# Altium PCB LO2.PcbDoc
Units mil, origin at the board's own origin, x right, y up, seen from the top; angles counter-clockwise.
Board outline 1416.47 x 1876.47 mil, 4 copper layers (Top Layer, Internal Plane 1, Internal Plane 2, Bottom Layer), stack 29.834 mil thick; 133 components, 80 nets, 435 pads, 291 vias.
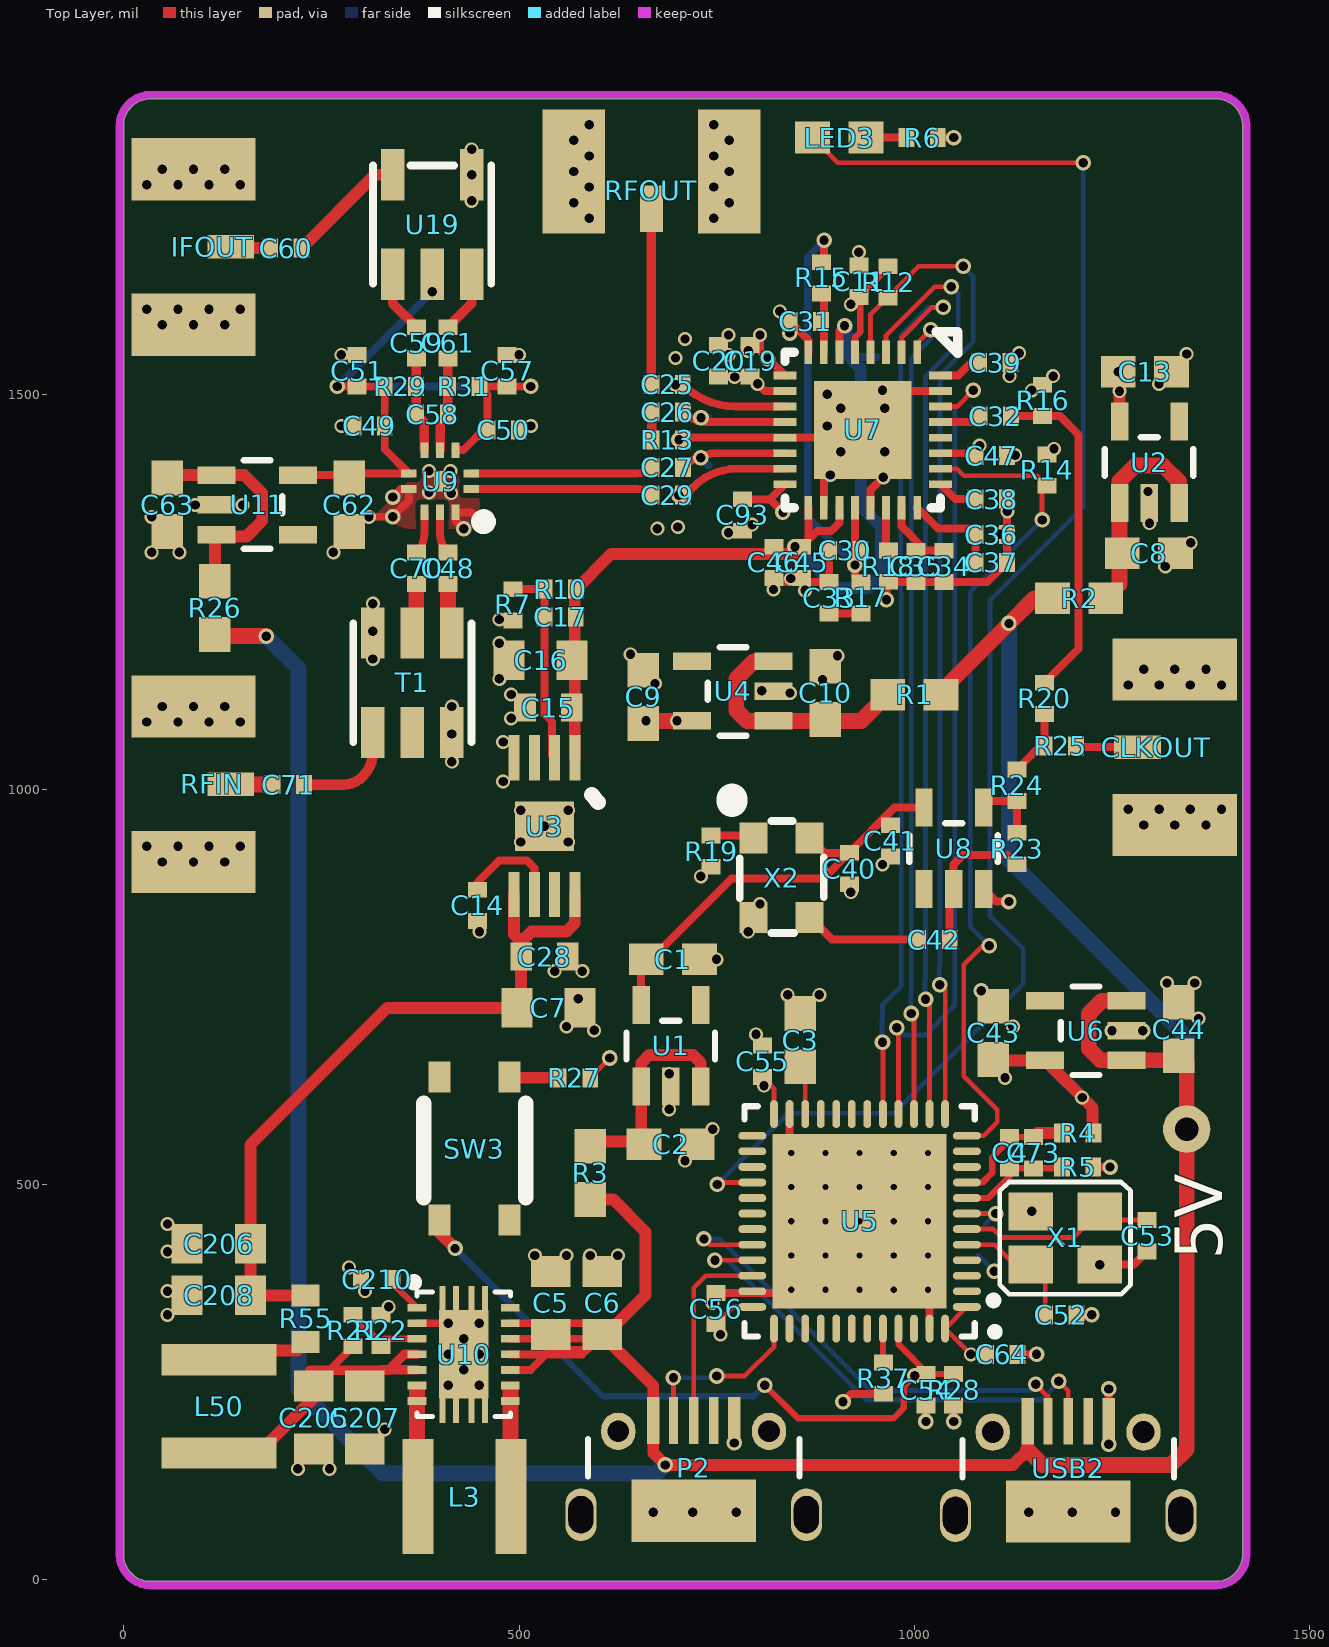
[diagram p0: Top Layer view]
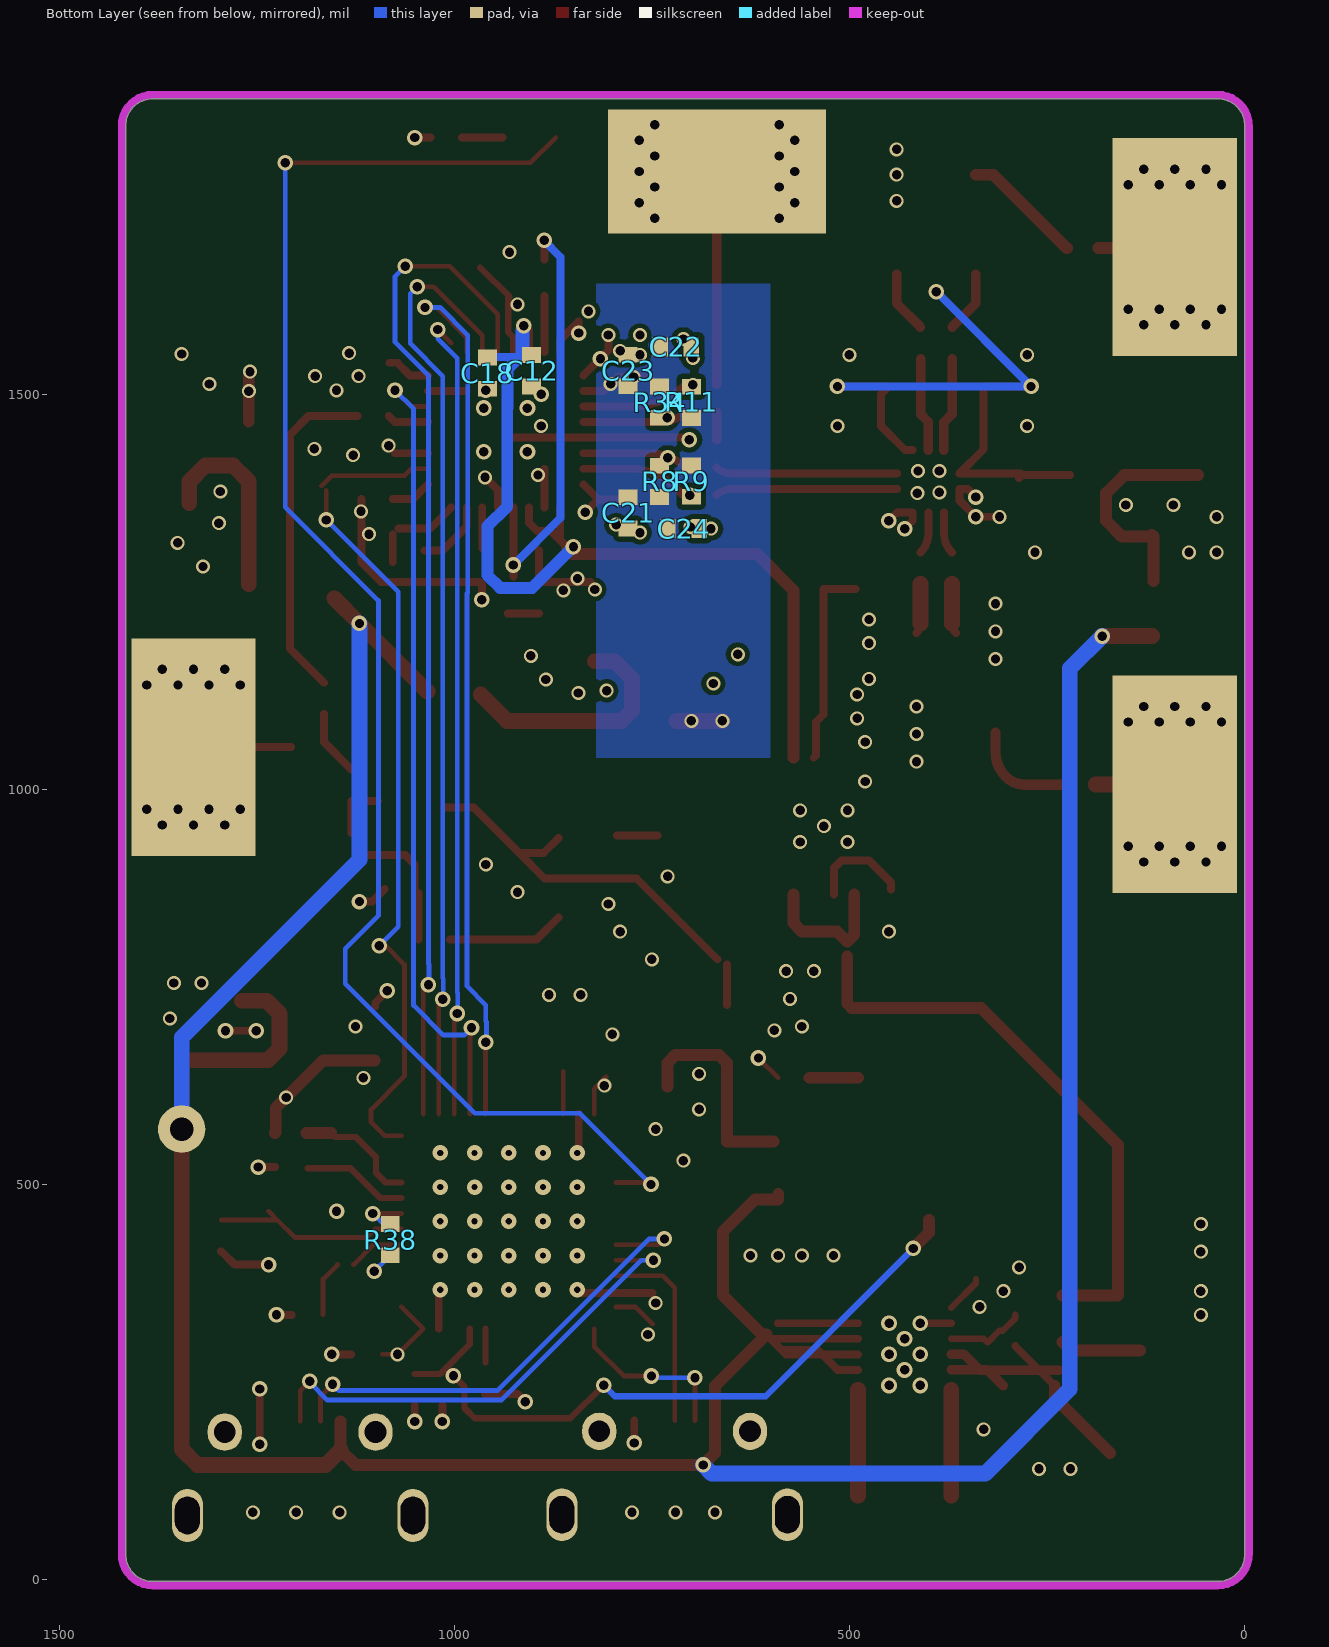
[diagram p1: Bottom Layer view, seen from below]
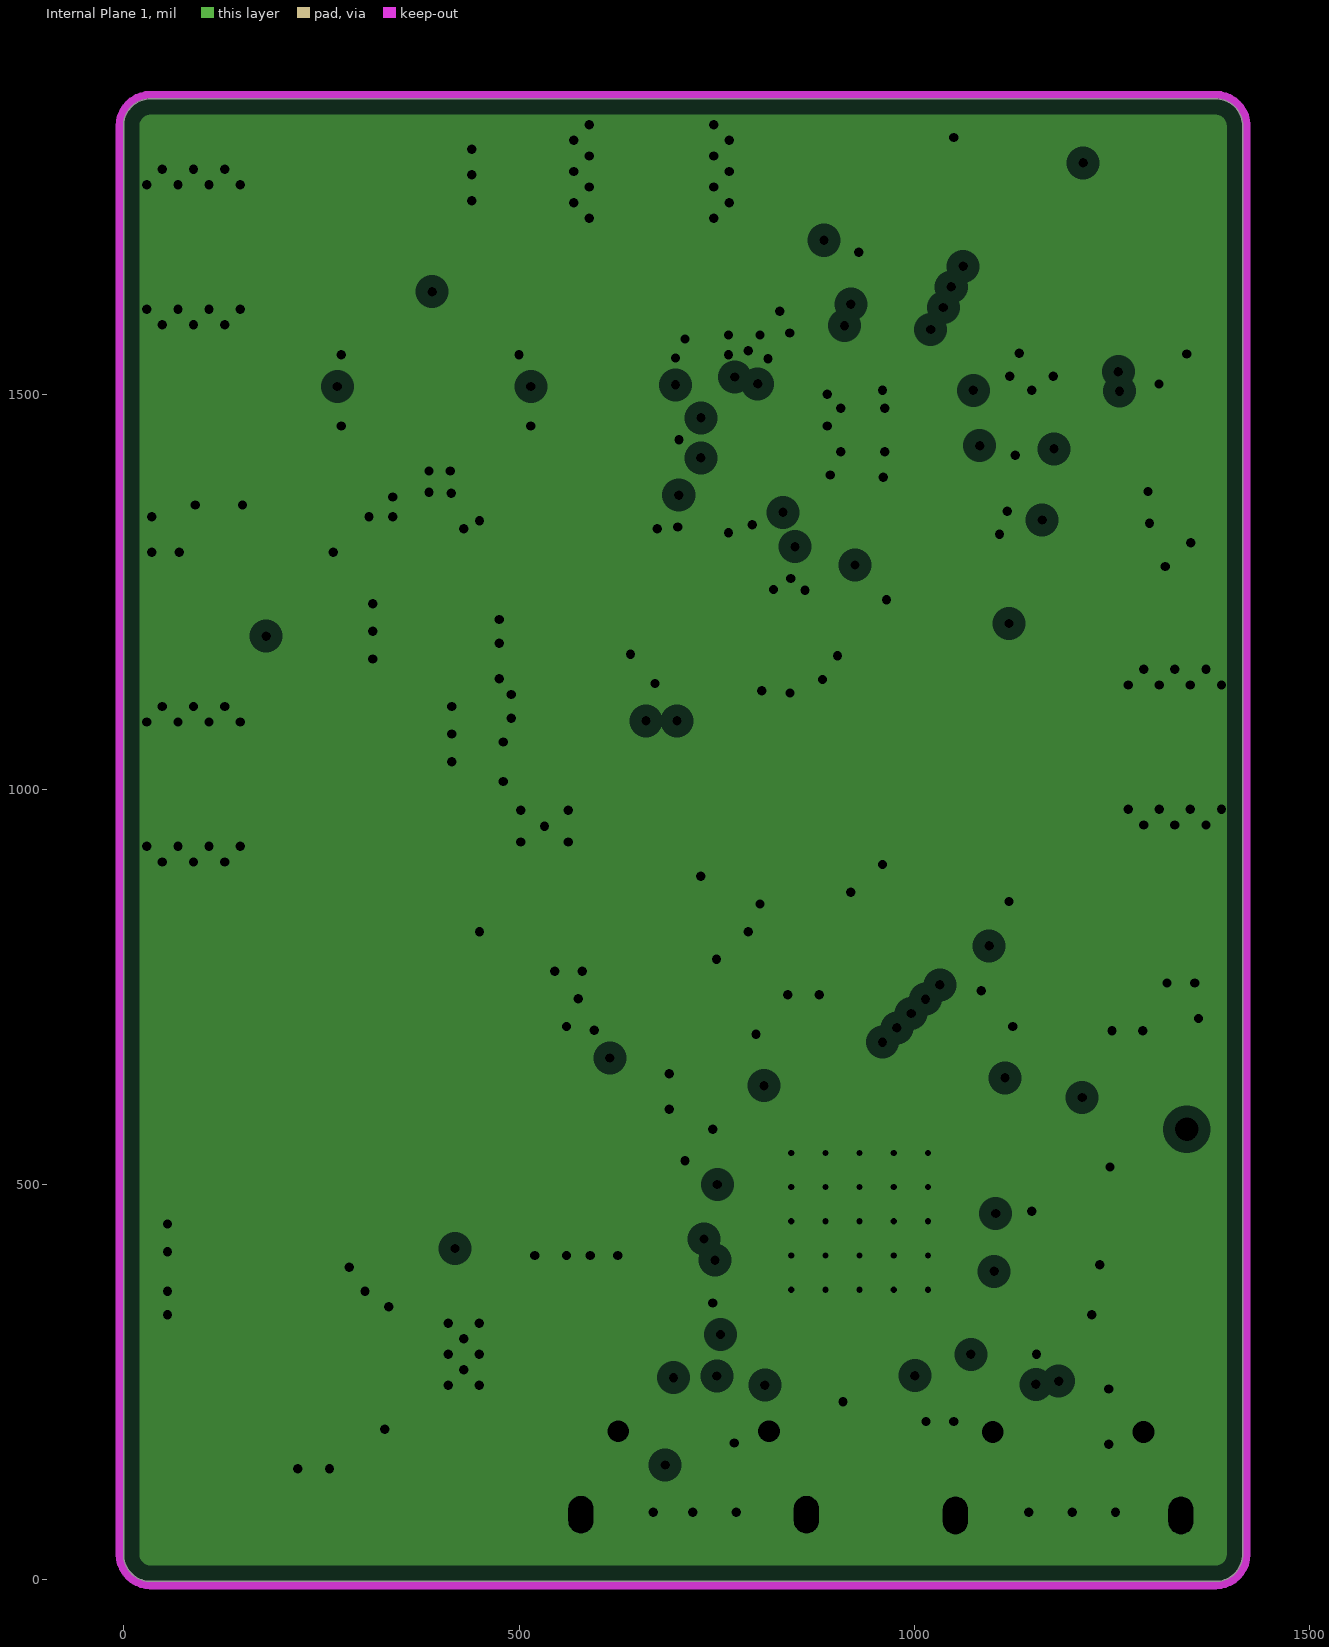
[diagram p2: Internal Plane 1, clearances drawn from the general rule]
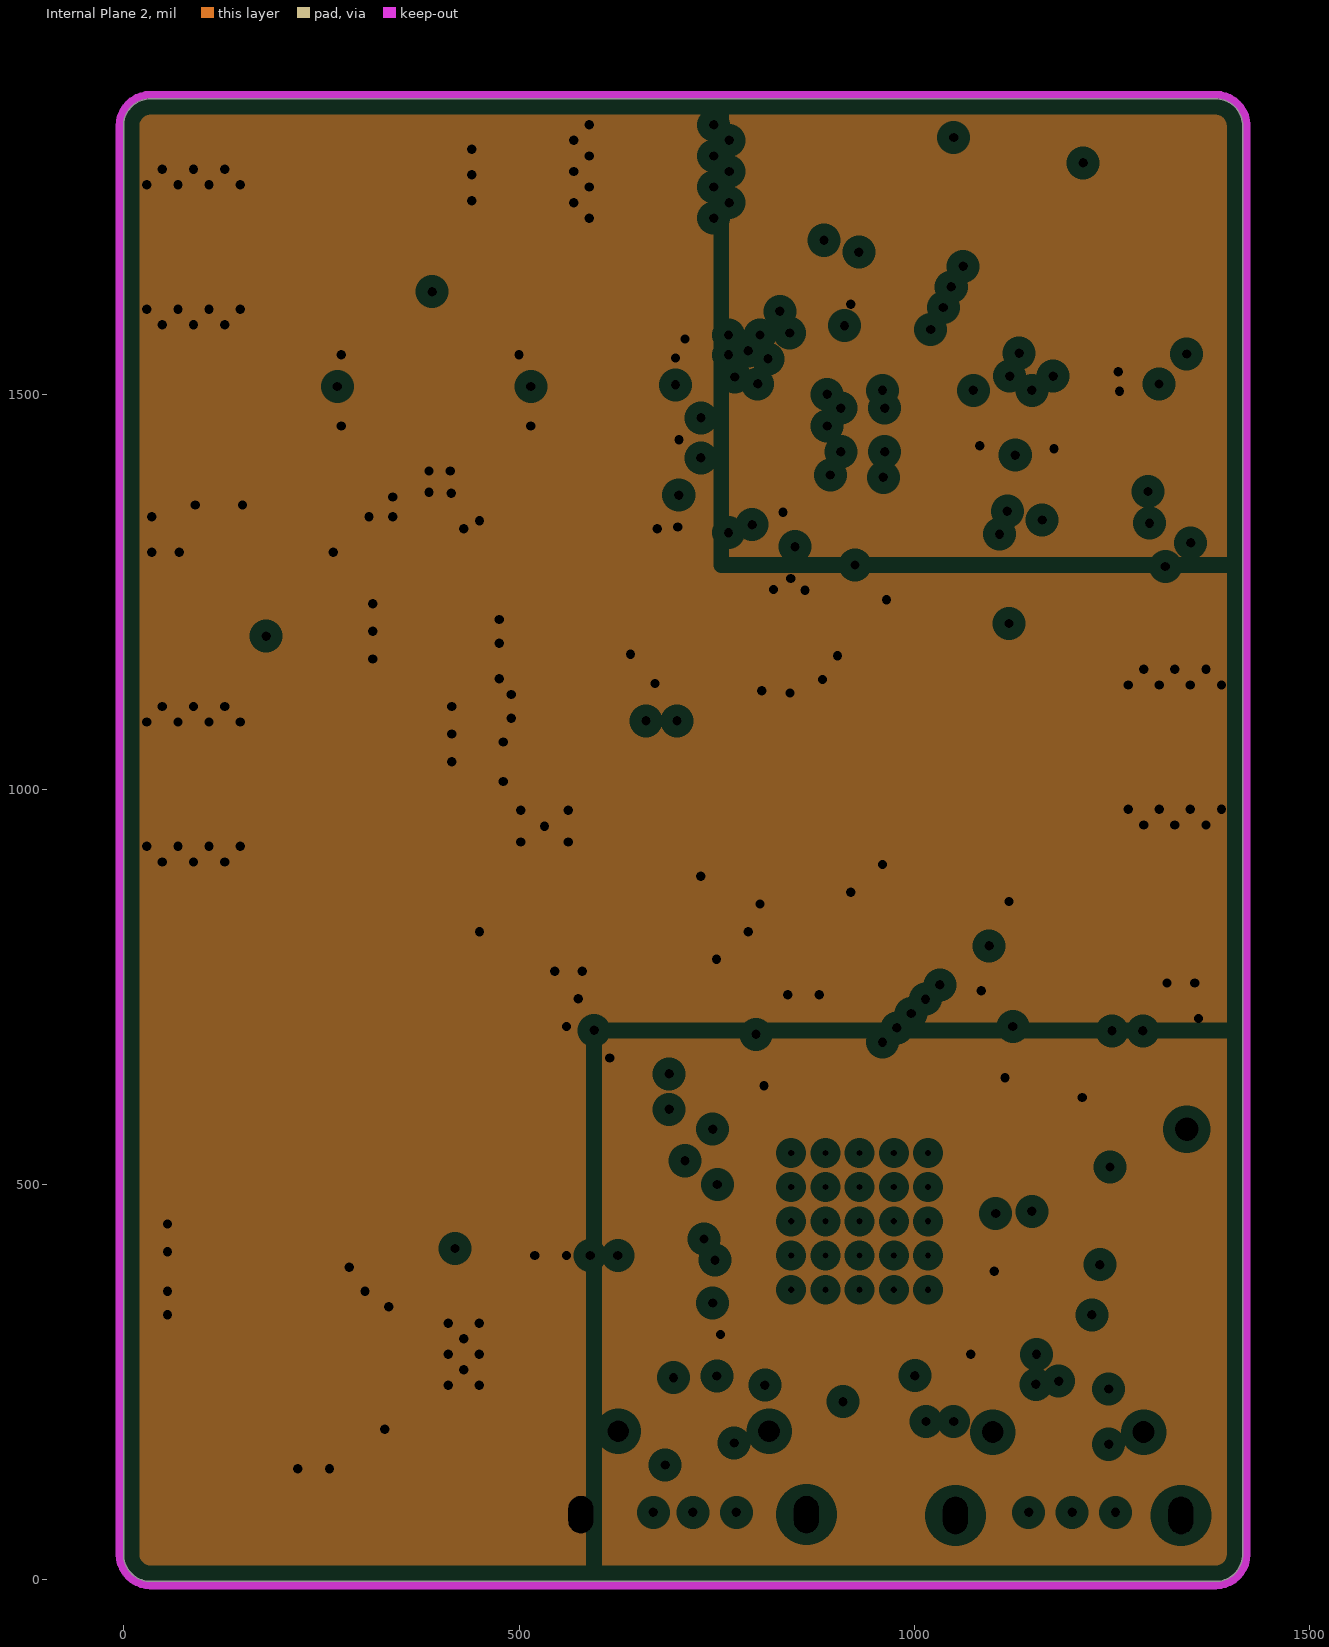
[diagram p3: Internal Plane 2, clearances drawn from the general rule]

## Layer stack, top to bottom
Top Solder: solder mask 0.4, Solder Resist, Dk 3.8
Top Layer: signal copper 1.4
Dielectric 1: prepreg 7.1, Dk 4.6
Internal Plane 1: plane copper 1.417, net GND
Dielectric 3: core 10, Dk 4.6
Internal Plane 2: plane copper 1.417, net (Multiple Nets)
Dielectric 4: prepreg 7.1, Dk 4.6
Bottom Layer: signal copper 1.4
Bottom Solder: solder mask 0.4, Solder Resist, Dk 3.8

## Board outline
-0.6,31.96 -0.6,1839.72 cw(c33.76,1839.72) 33.76,1874.08 1381.52,1874.08 cw(c1381.52,1839.72) 1415.87,1839.72 1415.87,31.96 cw(c1381.52,31.96) 1381.52,-2.39 33.76,-2.39 cw(c33.76,31.96)

## Design rules (kind name [scope] priority, off if disabled: settings)
Clearance 50R [InNetClass('50R') vs InPolygon] p1: gap=15 ignorepadtopadclearanceinfootprint=FALSE
Clearance [All] p2: gap=6 ignorepadtopadclearanceinfootprint=FALSE except(0: Arc-Hole Track-Hole SMDPad-Hole THPad-Hole Via-Hole Fill-Hole Poly-Hole Region-Hole Text-Hole)
DiffPairsRouting [All] p1: maxlimit=10 minlimit=10 mostfreqgap=10 toplayer_minwidth=5.98 toplayer_maxwidth=15 toplayer_prefwidth=15 bottomlayer_minwidth=5.98 bottomlayer_maxwidth=15 bottomlayer_prefwidth=15 maxuncoupledlength=500
MinimumSolderMaskSliver [All] p1 off: minsoldermaskwidth=10
PlaneClearance [All] p1: clearance=15
PlaneConnect [All] p1: planeconnectstyle=Direct reliefexpansion=20 reliefentries=4 reliefconductorwidth=10 reliefairgap=10
PolygonConnect [All] p1: connectstyle=Direct reliefconductorwidth=10 reliefentries=4 polygonreliefangle="90 Angle" airgapwidth=10
RoomDefinition mixer [InComponentClass('mixer')] p1 off: confinementstyle=ConfineIn formatcopy=TRUE lockcomponents=FALSE outline 1459.63,58.5 1599.63,58.5 1599.63,293.5 1459.63,293.5
RoomDefinition source [InComponentClass('source')] p2 off: confinementstyle=ConfineIn formatcopy=TRUE lockcomponents=FALSE outline 1024.63,1468.5 10174.63,1468.5 10174.63,1818.5 1024.63,1818.5
RoomDefinition power [InComponentClass('power')] p3 off: confinementstyle=ConfineIn formatcopy=TRUE lockcomponents=FALSE outline 1029.63,1143.5 3084.63,1143.5 3084.63,1418.5 1029.63,1418.5
RoomDefinition mcu [InComponentClass('mcu')] p4 off: confinementstyle=ConfineIn formatcopy=TRUE lockcomponents=FALSE outline 1029.63,428.5 11004.63,428.5 11004.63,1098.5 1029.63,1098.5
RoutingVias [All] p1: holewidth=12 width=20 viastyle="Through Hole" minholewidth=11.81 minwidth=19.68 maxholewidth=28 maxwidth=50
SilkToBoardRegionClearance [All] p1 off:
SilkToSilkClearance [All] p1 off: silktosilkclearance=10
SilkToSolderMaskClearance [IsPad] p1 off: minsilkscreentomaskgap=10 clearancetoexposedcopper=TRUE
SolderMaskExpansion [All] p1: expansion=4
Width [All] p1: maxlimit=60 minlimit=6 preferedwidth=6
23 further rules are at their usual default settings.

## Classes and differential pairs
component class mixer: C48 C49 C50 C51 C57 C58 C59 C60 C61 C70 C71 IFOUT R29 R31 RFIN T1 U9 U19
component class mcu: C3 C4 C52 C53 C54 C55 C56 C64 C73 C? LED3 P2 R4 R5 R6 R27 R28 R37 R38 R? SW3 U5 USB2 X1
component class power: 5V C1 C2 C5 C6 C7 C8 C9 C10 C13 C14 C15 C16 C17 C28 C43 C44 C62 C63 C205 C206 C207 C208 C210 L3 L50 R1 R2 R3 R7 R10 R21 R22 R26 R55 U1 U2 U3 U4 U6 U10 U11
component class source: C11 C12 C18 C19 C20 C21 C22 C23 C24 C26 C27 C29 C30 C31 C32 C33 C34 C35 C36 C37 C38 C39 C40 C41 C42 C45 C46 C47 C93 CLKOUT R8 R9 R11 R12 R13 R14 R15 R16 R17 R18 R19 R20 R23 R24 R25 R34 RFOUT U7 U8 X2

## Components (designator, comment, footprint, x,y, rotation, side; value= is the part's Value field where it differs from the comment)
5V "TestPad" TestPad 1345,570 r0 top
C1 "4.7uF" 0603 695,785 r180 top
C2 "4.7uF" 0603 692,551 r180 top
C3 "Cap" 0603 856,683 r270 top value=4.7uF
C4 "Cap" 0402 1121,540 r90 top value=0.1uF
C5 "22uF" 0805 540,350 r90 top value=10uF/16V
C6 "22uF" 0805 605,350 r90 top value=10uF/16V
C7 "10uF" 0805 537.2,723.39 r180 top
C8 "4.7uF" 0603 1297.44,1298.75 r180 top
C9 "4.7uF" 0603 657.44,1117.44 r270 top
C10 "4.7uF" 0603 887.44,1122.44 r270 top
C11 "10pF" 0402 930,1643 r90 top
C12 "0.1uF" 0402 902,1530 r270 bottom
C13 "4.7uF" 0603 1292.44,1528.75 r180 top
C14 "10nF" 0402 447.2,853.39 r270 top
C15 "0.1uF" 0603L 537.2,1103.39 r180 top
C16 "10uF" 0805 527.2,1163.39 r0 top
C17 "10nF" 0402 552.2,1218.39 r180 top
C18 "10pF" 0402 958,1527 r270 bottom
C19 "0.1uF" 0402 792.56,1542.44 r90 top
C20 "10pF" 0402 752.56,1542.44 r90 top
C21 "0.1uF" 0402 780,1350 r270 bottom
C22 "10pF" 0402 720,1560 r180 bottom
C23 "0.1uF" 0402 780,1530 r90 bottom
C24 "10pF" 0402 710,1330 r180 bottom
C25 "1nF" 0402 687.56,1512.44 r180 top
C26 "1nF" 0402 687.56,1477.44 r0 top
C27 "1nF" 0402 687.56,1407.44 r0 top
C28 "0.1uF" 0603L 532.2,788.39 r0 top
C29 "1nF" 0402 687.56,1372.44 r0 top
C30 "1nF" 0402 912.56,1302.44 r180 top
C31 "1nF" 0402 862.56,1592.44 r180 top
C32 "1nF" 0402 1102.56,1472.44 r0 top
C33 "1nF" 0402 892.56,1242.44 r90 top
C34 "0.1uF" 0402 1037.56,1282.44 r270 top
C35 "10pF" 0402 1002.56,1282.44 r270 top
C36 "0.1uF" 0402 1097.56,1322.44 r0 top
C37 "10pF" 0402 1097.56,1287.44 r0 top
C38 "0.1uF" 0402 1097.56,1367.44 r0 top
C39 "0.1uF" 0402 1102,1540 r0 top
C40 "0.1uF" 0402 918,900 r270 top
C41 "0.1uF" 0402 970,935 r270 top
C42 "0.1uF" 0402 1025,810 r0 top
C43 "4.7uF" 0603 1100,692 r270 top
C44 "4.7uF" 0603 1335,697 r270 top
C45 "0.1uF" 0402 857.56,1287.44 r270 top
C46 "10pF" 0402 822.56,1287.44 r270 top
C47 "0.1uF" 0402 1097.56,1422.44 r0 top
C48 "1nF" 0402 410,1280 r270 top
C49 "1nF" 0402 310,1460 r0 top
C50 "1nF" 0402 480,1455 r180 top
C51 "1nF" 0402 295,1530 r270 top
C52 "Cap" 0402 1186,335 r180 top value=20pF
C53 "Cap" 0402 1295,435 r90 top value=20pF
C54 "Cap" 0402 1015,240 r90 top value=0.1uF
C55 "Cap" 0402 808,656 r270 top value=0.1uF
C56 "Cap" 0402 749,343 r270 top value=0.1uF
C57 "1nF" 0402 485,1530 r270 top
C58 "NC" 0402 390,1475 r180 top
C59 "0R" 0402 370,1565 r90 top
C60 "1nF" 0402 205,1685 r180 top
C61 "0R" 0402 410,1565 r90 top
C62 "4.7uF" 0603 285,1360 r90 top
C63 "4.7uF" 0603 55,1360 r90 top
C64 "Cap" 0402 1111,285 r180 top value=0.1uF
C70 "1nF" 0402 370,1280 r270 top
C71 "1nF" 0402 208,1006 r180 top
C73 "Cap" 0402 1151,540 r90 top value=0.1uF
C93 "0.1uF" 0402 782.56,1347.44 r270 top
C205 "22uF" 0805 240,205 r270 top value=10uF/16V
C206 "1uF" 0805 120,425 r180 top value=10uF/16V
C207 "22uF" 0805 305,205 r270 top value=10uF/16V
C208 "22uF" 0805 120,360 r180 top value=10uF/16V
C210 "100nF" 0402 320,380 r180 top
CLKOUT "Antenna" SMA-2B 1330,955 r90 top
IFOUT "Antenna" SMA-2B 88,1785 r270 top
L3 "2.2uH" L4015 490,105 r180 top
L50 "2.2uH" L4015 120,160 r90 top
LED3 "LED0" 0603 905,1825 r0 top
P2 "SWD_MicroUSB" MICRO-YZX 721,-29 r0 top
R1 "100" 0603 1000,1120 r0 top value=0Ohm
R2 "100" 0603 1209,1242 r180 top value=0Ohm
R3 "100" 0603 590,515 r270 top value=0Ohm
R4 "0R/FB" 0402 1207,565 r0 top
R5 "0R/FB" 0402 1207,522 r180 top
R6 "10k" 0402 1010,1825 r0 top value=0Ohm
R7 "10k" 0402 492.2,1233.39 r90 top
R8 "50R" 0402 740,1390 r270 bottom value=0Ohm
R9 "50R" 0402 700,1390 r90 bottom value=0Ohm
R10 "17k" 0402 552.2,1253.39 r0 top
R11 "50R" 0402 700,1490 r270 bottom value=0Ohm
R12 "10k" 0402 967,1642 r90 top value=0Ohm
R13 "50R" 0402 687.56,1442.44 r0 top value=0Ohm
R14 "10k" 0402 1168,1404 r90 top value=0Ohm
R15 "50R" 0402 882.56,1647.44 r270 top value=0Ohm
R16 "50R" 0402 1162.56,1492.44 r270 top value=0Ohm
R17 "50R" 0402 932.56,1242.44 r270 top value=0Ohm
R18 "5.1k 1%" 0402 967.56,1282.44 r90 top value=0Ohm
R19 "0R" 0402 743,922 r270 top value=0Ohm
R20 "22R" 0402 1165,1115 r90 top value=0Ohm
R21 "100k" 0402 290,315 r90 top
R22 "11k" 0402 325,315 r90 top
R23 "1k" 0402 1130,925 r90 top value=0Ohm
R24 "22R" 0402 1130,1005 r90 top value=0Ohm
R25 "22R" 0402 1185,1055 r0 top value=0Ohm
R26 "100" 0603 115,1230 r270 top value=0Ohm
R27 "1k" 0402 570,635 r0 top value=0Ohm
R28 "1k" 0402 1050,240 r90 top value=0Ohm
R29 "NC" 0402 350,1510 r180 top
R31 "NC" 0402 430,1510 r0 top
R34 "50R" 0402 740,1490 r90 bottom value=0Ohm
R37 "Res2" 0402 961,255 r270 top value=10k
R38 "Res2" 0402 1081,430 r90 bottom value=10k
R55 "FB" 0603L 230,330 r270 top value=0Ohm
RFIN "Antenna" SMA-2B 88,1105 r270 top
RFOUT "Antenna" SMA-2B 766,1782 r180 top
SW3 "SW-PB" SW3x4 443.5,545.37 r90 top
T1 "TCM1-63AX+" TCM1-63AX+ 365,1135 r0 top
U1 "RT9013-28GB" SOT23-5 692,675 r0 top
U2 "RT9013-28GB" SOT23-5 1297.44,1413.75 r0 top
U3 "tps7a3001" MSOP8/VSSOP8+PAD 532.2,953.39 r270 top
U4 "RT9013-28GB" SOT23-5 770.94,1124.07 r90 top
U5 "STM32F401CCU6" STM-UFQFPN48_N 931,453.31 r180 top
U6 "RT9013-28GB" SOT23-5 1217.69,694.49 r90 top
U7 "ADF4355" ADF4351 935,1455 r270 top
U8 "74-1G04" SOT23-5 1050,925 r0 top
U9 "LTC5562" LTC5562 400,1390 r180 top
U10 "TPS63020" TPS63020 430,285 r270 top
U11 "RT9013-28GB" SOT23-5 168.5,1360.37 r270 top
U19 "TCM1-13MX+" TCM-13M+ 390,1715 r180 top
USB2 "USB Micro Type B" MICRO-YZX 1195,-30 r0 top
X1 "24.000 KHz 3.2x2.5mm 8-10pf" OSCILLATOR-3.2X2.5 1191,432 r0 top
X2 "OSC_40M" TXC_7Q 832.44,888.3 r270 top

## Footprints (in the part's own frame and the unit in brackets; to place one, negate y for a bottom-side part, rotate by r counter-clockwise, add the part's x,y. Pads: shape width x height; smd on the part's side, far side on the other; paste and mask are expansions set on the pad)
0402 [mil] "0402-RES"
  rect 20x24 smd: 1(-19.68,0) 2(20,0)
0603 [mil] "0603-RES"
  rect 44x40 smd: 1(-33.46,0) 2(34,0)
  body extent -31,-16 31,16, height 31
0603L [mm]
  rect 0.7x0.9 smd: 1(-0.75,0) 2(0.75,0)
  body extent -0.8,-0.4 0.8,0.4, height 0.8
0805 [mil]
  rect 39.37x50 smd: 1(-40,0) 2(40,0)
  body extent -50,-30 50,30, height 31
ADF4351 [mm]
  rect 3.15x3.15 smd: 0(0,0)
  rect 0.75x0.25 smd: 1(-2.5,1.75) 2(-2.5,1.25) 3(-2.5,0.75) 4(-2.5,0.25) 5(-2.5,-0.25) 6(-2.5,-0.75) 7(-2.5,-1.25) 8(-2.5,-1.75) 17(2.5,-1.75) 18(2.5,-1.25) 19(2.5,-0.75) 20(2.5,-0.25) 21(2.5,0.25) 22(2.5,0.75) 23(2.5,1.25) 24(2.5,1.75)
  rect 0.25x0.75 smd: 9(-1.75,-2.5) 10(-1.25,-2.5) 11(-0.75,-2.5) 12(-0.25,-2.5) 13(0.25,-2.5) 14(0.75,-2.5) 15(1.25,-2.5) 16(1.75,-2.5) 25(1.75,2.5) 26(1.25,2.5) 27(0.75,2.5) 28(0.25,2.5) 29(-0.25,2.5) 30(-0.75,2.5) 31(-1.25,2.5) 32(-1.75,2.5)
  silkscreen extent -3.15,-2.5 2.5,3.05, body extent -2.5,-2.5 2.5,2.5, height 0.7
L4015 [mm]
  rect 1x3.7 smd: 1(0,0) 2(3,0)
LTC5562 [mm]
  rect 0.4x0.65 smd: 0(0,0)
  rect 0.5x0.25 smd: 1(-1,0.25) 2(-1,-0.25) 6(1,-0.25) 7(1,0.25)
  rect 0.25x0.5 smd: 3(-0.5,-1) 4(0,-1) 5(0.5,-1) 8(0.5,1) 9(0,1) 10(-0.5,1)
  silkscreen extent -1.6,1.1 -1.2,1.5, body extent -1,-1 1,1, height 0.75
MICRO-YZX [mm]
  rect 0.4x1.5 smd: 1(-1.3,5.85) 5(1.3,5.85)
  rect 0.3x1.5 smd: 2(-0.65,5.85) 3(0,5.85) 4(0.65,5.85)
  oval 1x1.7 hole 0.8 slot 1.2 at 90 deg: 5(-3.625,2.82) 5(3.625,2.82)
  oval 1.1x1.2 hole 0.7: 5(-2.425,5.5) 5(2.425,5.5)
  rect 4x2 smd: 5(0,2.95)
  silkscreen extent -3.4,4.05 3.4,5.25, body extent -4.02,0.33 3.98,5.93, height 2.6
MSOP8/VSSOP8+PAD [mm]
  rect 1.6x1.9 smd: 0(0,0)
  rect 1.45x0.35 smd: 1(-2.2,0.975) 2(-2.2,0.325) 3(-2.2,-0.325) 4(-2.2,-0.975) 5(2.2,-0.975) 6(2.2,-0.325) 7(2.2,0.325) 8(2.2,0.975)
  silkscreen extent -1.02,1.52 -0.77,1.72
OSCILLATOR-3.2X2.5 [mil] "OSCILLATOR-3.2X2.5"
  rect 56x48 smd: 1(-43.31,-33.46) 2(44,-33.46) 3(44,34) 4(-43.31,34)
  silkscreen extent -95,-83 83,71
SMA-2B [mm]
  rect 0.75x1.5 smd: 1(2.5,1.2)
  rect 2x4 smd: GND(0,0) GND(5,0)
  rect 7x4 smd far side: GND(2.5,0)
  Top Layer pour cut-out: 1,2 4,2 4,-2 1,-2
SOT23-5 [mil] "SOT23-5"
  rect 22x48 smd: 1(-37.4,-51.19) 2(0,-51.19) 3(38,-51.19) 4(38,52) 5(-37.4,52)
  silkscreen extent -56,-17 56,32
STM-UFQFPN48_N [mm] "QFN, 48-Leads, Body 7.1x7.1mm, Pitch 0.5mm, Thermal Pad 5.6x5.6mm, IPC Medium Density"
  oval 0.9x0.25 smd: 1(-3.45,2.75) 2(-3.45,2.25) 3(-3.45,1.75) 4(-3.45,1.25) 5(-3.45,0.75) 6(-3.45,0.25) 7(-3.45,-0.25) 8(-3.45,-0.75) 9(-3.45,-1.25) 10(-3.45,-1.75) 11(-3.45,-2.25) 12(-3.45,-2.75) 25(3.45,-2.75) 26(3.45,-2.25) 27(3.45,-1.75) 28(3.45,-1.25) 29(3.45,-0.75) 30(3.45,-0.25) 31(3.45,0.25) 32(3.45,0.75) 33(3.45,1.25) 34(3.45,1.75) 35(3.45,2.25) 36(3.45,2.75)
  oval 0.25x0.9 smd: 13(-2.75,-3.45) 14(-2.25,-3.45) 15(-1.75,-3.45) 16(-1.25,-3.45) 17(-0.75,-3.45) 18(-0.25,-3.45) 19(0.25,-3.45) 20(0.75,-3.45) 21(1.25,-3.45) 22(1.75,-3.45) 23(2.25,-3.45) 24(2.75,-3.45) 37(2.75,3.45) 38(2.25,3.45) 39(1.75,3.45) 40(1.25,3.45) 41(0.75,3.45) 42(0.25,3.45) 43(-0.25,3.45) 44(-0.75,3.45) 45(-1.25,3.45) 46(-1.75,3.45) 47(-2.25,3.45) 48(-2.75,3.45)
  rect 5.6x5.6 smd: 49(0,0)
  silkscreen extent -4.48,-3.7 3.7,3.7, body extent -3.55,-3.55 3.55,3.55, height 0.6
SW3x4 [mm]
  rect 1x0.7 smd: 1(-2.3,1.125) 2(2.3,-1.125) 3(2.3,1.125) 4(-2.3,-1.125)
  silkscreen extent -1.58,-1.65 1.45,1.63, body extent -2,-1.5 2,1.5, height 2.6
TCM1-63AX+ [mm]
  rect 0.75x1.65 smd: 1(-1.27,1.6) 2(0,1.6) 3(1.27,1.6) 4(1.27,-1.6) 5(0,-1.6) 6(-1.27,-1.6)
  silkscreen extent -1.9,-1.9 1.9,1.9
TCM-13M+ [mm]
  rect 0.75x1.65 smd: 1(-1.27,1.6) 2(0,1.6) 3(1.27,1.6) 4(1.27,-1.6) 5(-1.27,-1.6)
  silkscreen extent -1.9,-1.9 1.9,1.9
TestPad [mil]
  round 60 hole 30: 1(0,0)
TPS63020 [mm]
  rect 0.8x0.2 smd: 0(-1.8,-0.68) 0(-1.8,-0.25) 0(-1.8,0.25) 0(-1.8,0.68) 0(1.8,-0.68) 0(1.8,-0.25) 0(1.8,0.25) 0(1.8,0.68)
  rect 2.85x1.58 smd: 0(0,0)
  rect 0.25x0.6 smd: 1(-1.5,-1.5) 2(-1,-1.5) 3(-0.5,-1.5) 4(0,-1.5) 5(0.5,-1.5) 6(1,-1.5) 7(1.5,-1.5) 8(1.5,1.5) 9(1,1.5) 10(0.5,1.5) 11(0,1.5) 12(-0.5,1.5) 13(-1,1.5) 14(-1.5,1.5)
  silkscreen extent -2.32,-1.6 2,1.5, body extent -2,-1.5 2,1.5, height 1
TXC_7Q [mm]
  rect 1x0.9 smd: 1(-1.275,-0.9) 2(1.275,-0.9) 3(1.275,0.9) 4(-1.275,0.9)
  silkscreen extent -2.52,-1.6 1.78,1.35

## Part data
C1 C2 C7 C8 C9 C10 C13 C14 C15 C16 C17 C28 C43 C44 C62 C63 C210: library part Cap, "Capacitor", LatestRevisionDate=17-Jul-2002, LatestRevisionNote="Re-released for DXP Platform.", PackageDescription="Radial Cap, Thru-Hole; 2 Leads; 0.3 in Pin Spacing", PackageReference=RAD-0.3, Published=8-Jun-2000, Publisher="Altium Limited"
C3 C4 C52 C53 C54 C55 C56 C64 C73: "Capacitor", LatestRevisionDate=17-Jul-2002, LatestRevisionNote="Re-released for DXP Platform.", PackageDescription="Radial Cap, Thru-Hole; 2 Leads; 0.3 in Pin Spacing", PackageReference=RAD-0.3, Published=8-Jun-2000, Publisher="Altium Limited"
C5 C6 C205 C206 C207 C208: library part C, PSpiceTemplate="C^@REFDES %1 %2 ?TOLERANCE|C^@REFDES| @VALUE ?IC/IC=@IC/ ?TOLERANCE|\n.model C^@REFDES CAP C=1 DEV=@TOLERANCE%|", PCB DECAL=C0805, Source_Path=C:\USERS\EULER-SJ\DESKTOP\CHEN-PI2\LIBRARY1.OLB
C11 C12 C18 C19 C20 C21 C22 C23 C24 C25 C26 C27 C29 C30 C31 C32 C33 C34 C35 C36 C37 C38 C39 C40 C41 C42 C45 C46 C47 C48 C49 C50 C51 C57 C58 C59 C60 C61 C70 C71 C93: library part CAP0402-CAP, "<b>Capacitor</b> / Standard 0603 ceramic capacitor, and 0.1\" leaded capacitor.", PARTNO=CC0402ZRY5V7BB104
L3 L50: library part Inductor, "Inductor", Code_IEC=1005, Code_JEITA=0402, LatestRevisionDate=29-May-2009, LatestRevisionNote="IPC-7351 Footprint Added.", PackageDescription="Chip Inductor", PackageReference=0402-A, Published=8-Jun-2000, Publisher="Altium Limited"
LED3: "Typical INFRARED GaAs LED", LatestRevisionDate=08-Jul-2005, LatestRevisionNote="Mech Layer 1 removed.", PackageDescription="LED; 2 Leads", PackageReference=LED-0, Published=8-Jun-2000, Publisher="Altium Limited"
P2: "Connector SMD USB Micro Type B middle mount", Manufacturer 1="Molex Inc", Package / Case=SMD, Supplier Part Number 1=WM17142CT-ND, SCDType=undef, Supplier 1=Digi-Key
R1 R2 R3 R4 R5 R6 R7 R8 R9 R10 R11 R12 R13 R14 R15 R16 R17 R18 R19 R20 R21 R22 R23 R24 R25 R26 R27 R28 R29 R31 R34 R55: library part Res2, "Resistor", LatestRevisionDate=17-Jul-2002, LatestRevisionNote="Re-released for DXP Platform.", PackageDescription="Axial Device, Thru-Hole; 2 Leads; 0.4 in Pin Spacing", PackageReference=AXIAL-0.4, Published=8-Jun-2000, Publisher="Altium Limited"
R37 R38: "Resistor", LatestRevisionDate=17-Jul-2002, LatestRevisionNote="Re-released for DXP Platform.", PackageDescription="Axial Device, Thru-Hole; 2 Leads; 0.4 in Pin Spacing", PackageReference=AXIAL-0.4, Published=8-Jun-2000, Publisher="Altium Limited"
SW3: "Switch", LatestRevisionDate=17-Jul-2002, LatestRevisionNote="Re-released for DXP Platform.", PackageDescription="Switch; 2 Leads", PackageReference=SPST-2, Published=24-Mar-1999, Publisher="Altium Limited"
U1 U2 U4 U6 U11: library part LP5907
U5: "ARM Cortex-M4 32-bit MCU+FPU, 105 DMIPS, 256 kB Flash, 64 kB Internal RAM, 36 I/Os, 48-pin UFQFPN, -40 to 85 degC, Tray", I/Os (High Current)=36, Manufacturer=STMicroelectronics, Operating Frequency(F) (Processor speed) (MHz)=84, Supplier Part Number 1=19X6217, Supply Voltage(Vcc) max (V)=3.6, Supply Voltage(Vcc) min (V)=1.8, ComponentLink1Description="Manufacturer URL", ComponentLink1URL=http://www.st.com/web/en/home.html, ComponentLink2Description=Datasheet, ComponentLink2URL=http://www.st.com/st-web-ui/static/active/en/resource/technical/document/data_brief/DM00071938.pdf, ComponentLink3Description="Package Specification", ComponentLink3URL=http://www.st.com/st-web-ui/static/active/en/resource/technical/document/data_brief/DM00071938.pdf, Core="ARM Cortex-M4", DatasheetVersion="Rev. 1", FLASH Size (Prog) (kB)=256, Internal RAM Size (kB)=64, Mounting Technology="Surface Mount", PackageDescription="48-Pin Ultra Thin Fine Pitch Quad Flat No-Lead, 7 x 7 x 0.6 mm Body, 0.5 mm Pitch, Exposed Pad", PackageReference=UFQFPN48, PackageVersion="Rev. 1, 04/2013", Packing=Tray, PartNumber=STM32F401CCU6, Supplier 1=Newark, Supplier 2=Mouser, Supplier Part Number 2=511-STM32F401CCU6
U19: library part TCM-63AX+
USB2: library part USB_Micro_TypeB, "Connector SMD USB Micro Type B middle mount", Manufacturer 1="Molex Inc", Manufacturer Part Number 1=47491-0001, Package / Case=SMD, Supplier Part Number 1=WM17142CT-ND, SCDType=undef, Supplier 1=Digi-Key
X1: library part OSCILLATOR-3.2X2.5, "Crystal Oscillator in 3.2x2.5 SMD"

## Via types
v1: diameter 17.72, hole 11.81, Top Layer to Bottom Layer, 188 vias
v2: diameter 19.68, hole 11.81, Top Layer to Bottom Layer, 66 vias
v3: diameter 19.68, hole 7.87, Top Layer to Bottom Layer, 25 vias
v4: diameter 20, hole 12, Top Layer to Bottom Layer, 12 vias

## Nets (pads, with @x,y where several pads share a name; then routed paths per layer and width w, separated by ;. In a path a pad name is that pad's centre, name@x,y a point inside that pad or via, vN(x,y) a via of type N, cw(c..) or ccw(c..) an arc to the next point about the centre after c; other vN are vias at no path point)
3.3A: C11.1 C13.2 C47.1 C93.1 R12.2 R14.2 U2.5 U7.5 U7.16 U7.27 | length 311
  Top Layer w8: U7.5 925.16,1572.1 931.84,1578.78 C11.1@931.84,1621.47 ; C11.1 R12.2@967,1660.31
  Top Layer w10: C93.1 817.6,1367.13 ; v2(834,1350.72) 817.6,1367.13 ; U7.16 817.6,1367.13 ; U7.27 C47.1@1074.84,1425.47
  Top Layer w15: U2.5 C13.2@1260.04,1527.15
  other v1: 1177,1431 1083,1435 1260.04,1504 1258.44,1528.75 920,1614
3.3CLK: C1.2 C40.1 C41.1 U1.5 U8.5 X2.4 | length 534.6
  Top Layer w10: U1.5 C1.2@654.6,778.6 ; C1.2@667,785 769,887 885.31,887 C40.1 ; X2.4 886.68,919.68 C40.1 ; U8.5 975.31,977 C40.1
3.3D: C43.2 C55.2 C56.2 C64.2 R4.2 R27.2 R38.1 U5.1 U5.24 U5.36 U5.48 U6.5 | length 458.8
  Top Layer w6: R27.2 v2(615,660) ; C56.2 771.04,345.04 U5.36 ; C55.2 822.73,621.27 U5.24 ; U5.1 U5.48 v1(1071.75,285) C64.2
  Top Layer w15: C43.2@1100.91,657.09 U6.5 1226,596.77 1226,566 R4.2
  Bottom Layer w6: R38.1 v2(1101.31,390)
  other v1: 755,310 1212.77,610 810,625 1115,635
3.3MIX: C49.2 C50.2 C51.2 C57.2 C62.2 R29.2 R31.2 U9.3 U9.6 U11.5 U19.2 | length 913.1
  Top Layer w10: U11.5 281.23,1397.77 C62.2 ; v2(270,1510) C51.2 R29.2 C49.2 330,1430.47 U9.6 C62.2@283.3,1399.84 ; U9.3 429.37,1429.37 460,1460 460,1500 R31.2 C57.2 v2(515,1510)
  Bottom Layer w10: v2(390,1630) v2(270,1510) v2(515,1510)
3.3RF: C9.2 C19.1 C20.1 C21.1 C22.1 C23.1 C24.1 R8.2 R9.2 R11.2 R34.2 U4.5 U7.10 | length 150
  Top Layer w10: C20.1 C19.1 811.1,1504.21 U7.10
  Top Layer w20: v1(660.67,1086.67) U4.5
  other v1: 700,1086.67 802,1513.31 773,1522
5.5V: C7.2 C28.1 C206.1 C208.1 R55.1 U3.5 U3.8 | length 905.6
  Top Layer w15: R55.1 160.47,359.53 C208.1 C206.1 160,550 333.39,723.39 C7.2 ; U3.5 493.82,816.18 502.68,807.32 515.35,820 560,820 570.59,830.59 U3.8 ; C7.2@502.68,728.86 C28.1
5V: 5V.1 C5.1 C6.1 C44.2 P2.1 R1.2 R2.2 R3.2 R26.2 U6.1 U6.3 U10.10 U10.11 U10.12 U10.13 USB2.1 | length 4772.3
  Top Layer w10: U10.10 514.84,265.32 534.53,285 ; U10.11 534.53,285 ; U10.12 C6.1@599.68,304.68 ; U10.13 C6.1@590.63,324.37 ; C6.1 C6.1@599.68,304.68 ; 534.53,285 580,285 C6.1@585.47,290.47 ; 534.53,285 540,290.47 C6.1@585.47,290.47 ; C6.1@585.47,290.47 C6.1@599.68,304.68
  Top Layer w15: R3.2@590,488 R3.2 619,481 660,440 660,360 610,310 C6.1 669.82,245.18 P2.1 669.82,160.18 v2(685,145) 1125,145 1143.82,163.82 USB2.1
  Top Layer w20: R26.2@117,1194 v2(180,1194) ; R1.2@1034,1124 v2(1120,1210) 1152,1242 ; 1143.82,163.82 1162.64,145 1325,145 1345,165 5V.1 C44.2@1345,653 ; U6.3 1237.49,732.49 1221,716 1221,672 1235.91,657.09 U6.1 C44.2@1340.91,657.09
  Bottom Layer w20: v2(180,1194) 221,1153 221,241 328,134 674,134 v2(685,145) ; v2(1120,1210) 1120,910.94 1345,685.94 5V.1
AGND: C4.1 C73.1 R5.2 U5.8 | length 134
  Top Layer w8: U5.8 1093.83,482.83 1131.31,520.32 C73.1 R5.2@1185.31,520.32
GND: C1.1 C2.1 C3.1 C5.2 C6.2 C7.1 C8.1 C9.1 C10.1 C11.2 C12.2 C13.1 C14.2 C15.2 C16.1 C18.2 C19.2 C20.2 C21.2 C22.2 C23.2 C24.2 C28.2 C30.2 C31.2 C33.2 C34.2 C35.2 C36.2 C37.2 C38.2 C39.2 C40.2 C41.2 C43.1 C44.1 C45.2 C46.2 C47.2 C49.1 C50.1 C51.1 C52.1 C53.1 C54.1 C55.1 C56.1 C57.1 C62.1 C63.1 C64.1 C93.2 C205.2 C206.2 C207.2 C208.2 C210.2 CLKOUT.GND IFOUT.GND P2.5 R5.1 R6.2 R7.1 R13.2 R16.1 R18.1 R19.2 R22.2 R28.1 R37.2 RFIN.GND RFOUT.GND T1.1 T1.4 U1.2 U2.2 U3.0 U3.4 U4.2 U5.23 U5.35 U5.47 U5.49 U6.2 U7.0 U7.8 U7.9 U7.13 U7.18 U7.21 U7.31 U8.3 U9.0 U9.7 U9.10 U10.0 U10.2 U11.2 U19.5 USB2.5 X1.2 X1.4 X2.2 | length 1713.6
  Top Layer w10: v1(310,1345) v2(340,1345) 360.63,1365.63 U9.7 350.16,1380.16 v2(340,1370) ; U10.2 v4(410.32,324.37) ; v2(430,1330) 419.68,1340.31 U9.10 439.37,1350.63 v2(450,1340) ; v2(702.44,1442.44) R13.2 ; R13.2@710.28,1445.16 U7.13 U7.0@925.16,1445.16 ; C56.1 U5.49@840.38,362.68 ; v2(772.18,172.82) P2.5@772.18,201.32 ; v1(805,1575) 805,1555.47 v2@815.47,1545 ; v2(815,1545) v2@815.47,1545 ; C46.2@827.56,1262.44 C33.2 C30.2 ; U7.9 v2@815.47,1545 ; U5.49@842.42,541.89 U5.23 ; v2(842.56,1577.56) C31.2 866.1,1568.9 U7.8 ; U7.18 U7.0@885.79,1405.79 ; v2(910,225) 920,235 R37.2 ; U7.21 944.84,1378.84 v1(961,1395) ; v2(965,1240) 965,1259.57 967.87,1262.44 C35.2 C34.2 1092.56,1262.44 C37.2 C36.2 C38.2 ; U7.0@984.21,1504.21 U7.31 ; v2(1015,200) C54.1 ; U5.47 U5.49@1019.58,364.72 ; R6.2 v2(1050,1825) ; v2(1050,200) R28.1 ; v2(1085,745) 1100,730 C43.1 ; U8.3 1103.81,858 v2(1120,858) ; C64.1 v2(1155,285) ; X1.4 v2(1149,466) ; C52.1 v2(1225,335) ; R5.1 v2(1248,522) ; v2(1235,398.54) 1278.22,398.54 C53.1 ; v2(1246.18,171.18) 1246.18,200.32 v2(1246.18,241.18) ; v2(1250.51,694.49) U6.2 v2(1289.49,694.49)
  Bottom Layer w10: v2(890,1500) 900,1510 C12.2 ; C18.2 v2(960,1505)
  other v1: 670,85 720,85 775,85 1145,85 1200,85 1255,85 220,140 260,140 330,190 55,335 335,345 745,350 55,365 305,365 285,395 520,410 560,410 590,410 625,410 55,415 55,450 710,530 745,570 690,595 690,640 800,690 595,695 560,700 1125,700 1360,710 575,735 840,740 880,740 1320,755 1355,755 545,770 580,770 750,785 450,820 790,820 805,855 920,870 730,890 960,905 48.63,908.15 88,908.15 127.37,908.15 28.94,927.83 68.32,927.83 107.68,927.83 147.06,927.83 502.2,933.39 562.2,933.39 532.2,953.39 1290.63,955 1330,955 1369.37,955 502.2,973.39 562.2,973.39 1270.94,974.68 1310.31,974.68 1349.68,974.68 1389.06,974.68 480,1010 415,1035 480,1060 415,1070 28.94,1085.31 68.32,1085.31 107.68,1085.31 147.06,1085.31 490,1090 48.63,1105 88,1105 127.37,1105 415,1105 490,1120 843,1122 807,1125 1270.94,1132.17 1310.31,1132.17 1349.68,1132.17 1389.06,1132.17 672,1134 884,1139 475,1140 1290.63,1151.85 1330,1151.85 1369.37,1151.85 315,1165 903,1169 641,1171 475,1185 315,1200 475,1215 315,1235 862,1252 822,1253 844,1267 1318,1282 35,1300 70,1300 265,1300 1350,1312 1108,1323 765,1325 675,1330 701,1332 795,1335 1298,1337 35,1345 1118,1352 90,1360 150,1360 414,1375 386,1376 1296,1377 894,1398 386,1403 413,1403 1128,1423 275,1460 515,1460 890,1460 1149,1505 1310,1513 1121,1523 1176,1523 698,1546 275,1550 500,1550 765,1550 1345,1551 1133,1552 790,1555 710,1570 765,1575 48.63,1588.15 88,1588.15 127.37,1588.15 830,1605 28.94,1607.83 68.32,1607.83 107.68,1607.83 147.06,1607.83 930,1680 588.83,1722.94 746.31,1722.94 569.15,1742.63 766,1742.63 440,1745 588.83,1762.31 746.31,1762.31 28.94,1765.31 68.32,1765.31 107.68,1765.31 147.06,1765.31 440,1777.99 569.15,1782 766,1782 48.63,1785 88,1785 127.37,1785 588.83,1801.68 746.31,1801.68 440,1810 569.15,1821.37 766,1821.37 588.83,1841.06 746.31,1841.06
  other v3: 844.39,366.69 887.69,366.69 931,366.69 974.31,366.69 1017.61,366.69 844.39,410 887.69,410 931,410 974.31,410 1017.61,410 844.39,453.31 887.69,453.31 931,453.31 974.31,453.31 1017.61,453.31 844.39,496.61 887.69,496.61 931,496.61 974.31,496.61 1017.61,496.61 844.39,539.92 887.69,539.92 931,539.92 974.31,539.92 1017.61,539.92
  other v4: 410.32,245.63 449.68,245.63 430,265.32 410.32,285 449.68,285 430,304.68 449.68,324.37 907.44,1427.44 962.56,1427.44 907.44,1482.56 962.56,1482.56
LED: LED3.1 U5.28 | length 1994.9
  Top Layer w6: v2@753.52,502.52 U5.28 ; LED3.1 903.54,1793 v2(1214,1793)
  Bottom Layer w6: v2(751,500) 841,590 974,590 1138,754 1138,798 1096,840 1096,1239 1214,1357 v2(1214,1793)
NetC2_2: C2.2 R3.1 U1.1 U1.3 | length 271.9
  Top Layer w15: R3.1@595.94,554.4 654.6,554.4 U1.1 654.6,653.6 665,664 720,664 730,654 U1.3
NetC3_2: C3.2 U5.22 | length 53.8
  Top Layer w6: U5.22 C3.2@862.1,642.9
NetC4_2: C4.2 C73.2 R4.1 U5.9 | length 150.7
  Top Layer w8: U5.9 1086.52,502.52 1099,515 1099,534.46 1124.54,560 C73.2
  Top Layer w15: C73.2@1156,565 R4.1
NetC8_2: C8.2 R2.1 U2.1 U2.3 | length 249.6
  Top Layer w20: R2.1@1260.04,1259.57 U2.1 1260.04,1390.04 1280,1410 1315,1410 1335.44,1389.56 U2.3
NetC10_2: C10.2 R1.1 U4.1 U4.3 | length 307.1
  Top Layer w20: U4.3 797.07,1162.07 775,1140 775,1100 788.33,1086.67 U4.1 933.2,1086.67 R1.1
NetC14_1: C14.1 U3.6 | length 130.6
  Top Layer w10: C14.1 447.2,882.2 475,910 510,910 519.41,900.59 U3.6
NetC17_2: C17.2 R7.2 R10.1 U3.2 | length 258.9
  Top Layer w10: R7.2 R10.1 532.46,1253.32 532.46,1095 541.95,1085.5 541.95,1043.05 U3.2
NetC25_1: C25.1 R11.1 U7.11 | length 136.8
  Top Layer w10: C25.1 ccw(c774.63,1579.83) 774.63,1484.53 U7.11
  other v1: 698,1512
NetC25_2: C25.2 RFOUT.1 | length 230.3
  Top Layer w12: C25.2 RFOUT.1@667.56,1742.74
NetC26_1: C26.1 R13.1 | length 35
  Top Layer w12: R13.1 C26.1
NetC26_2: C26.2 R34.1 U7.12 | length 142.1
  Top Layer w10: C26.2 ccw(c737.97,1507.86) 737.97,1464.84 U7.12
  Bottom Layer w10: v2(730.31,1470.31) R34.1
NetC27_1: C27.1 U9.2 | length 230.5
  Top Layer w10: U9.2 649.53,1399.84 ccw(c649.53,1425.79) C27.1
NetC27_2: C27.2 R8.1 U7.14 | length 148
  Top Layer w10: C27.2 cw(c751.09,1363.91) 751.09,1425.47 U7.14
  Bottom Layer w10: v2(730,1419.68) R8.1
NetC29_1: C29.1 U9.1 | length 230.6
  Top Layer w10: U9.1 649.24,1380.16 cw(c649.24,1353.81) C29.1
NetC29_2: C29.2 R9.1 U7.15 | length 144.6
  Top Layer w10: v2(702.13,1372.44) C29.2 ccw(c707.56,1379.4) 712.47,1374.47 721,1383 cw(c776.01,1327.99) 776.01,1405.79 U7.15
NetC30_1: C30.1 R15.1 R17.1 U7.20 | length 556.1
  Top Layer w10: R15.1@886,1670.57 v2(886,1695) ; R17.1@925.16,1269.53 v2(925.16,1284) U7.20
  Bottom Layer w10: v2(886,1695) 886.44,1694.56 865.44,1673.56 865.44,1343.72 v2(925.16,1284)
NetC31_1: C31.1 R15.2 U7.7 | length 70.8
  Top Layer w10: U7.7 R15.2@885.79,1624.21
NetC32_1: C32.1 U7.29 | length 52.6
  Top Layer w10: U7.29 1075.28,1464.84 C32.1
NetC33_1: C33.1 R17.2 | length 39.7
  Top Layer w10: C33.1 R17.2@932.24,1222.76
NetC34_1: C34.1 C35.1 U7.23 | length 89.8
  Top Layer w10: U7.23 984.21,1332.79 1014.87,1302.13 C34.1
NetC36_1: C36.1 C37.1 U7.24 | length 112.4
  Top Layer w10: U7.24 1030.47,1330 C36.1@1070.31,1330 ; C37.1 C36.1
NetC38_1: C38.1 U7.25 | length 52.2
  Top Layer w10: U7.25 1052.09,1367.44 C38.1
NetC39_1: C39.1 U7.32 | length 55.6
  Top Layer w10: U7.32 1055.9,1523.9 1072,1540 C39.1
NetC42_1: C42.1 X2.3 | length 149.1
  Top Layer w10: X2.3 895.97,810 C42.1
NetC42_2: C42.2 R23.1 U8.2 | length 179.8
  Top Layer w10: C42.2 U8.2@1045,868.81 ; U8.2 1050,905 1062,917 1118.31,917 R23.1
NetC48_1: C48.1 U9.9 | length 53.6
  Top Layer w10: U9.9 400,1323.83 ccw(c434.14,1323.83) C48.1
NetC48_2: C48.2 T1.3 | length 63.3
  Top Layer w10: T1.3@410,1210.06 ccw(c427.07,1210.06) T1.3
  Top Layer w20: T1.3@410,1210.06 C48.2
NetC52_2: C52.2 U5.5 X1.1 | length 142.2
  Top Layer w6: U5.5 1102.22,423.78 X1.1@1127.46,398.54 ; X1.1 1166,380.23 C52.2
NetC53_2: C53.2 U5.6 X1.3 | length 257.2
  Top Layer w6: U5.6 1100.23,443.46 1110.69,433 1202,433 X1.3@1224,455 ; X1.3 X1.3@1224,455 ; C53.2 X1.3@1224,455
NetC54_2: C54.2 R28.2 SW3.1 U5.45 | length 869.9
  Top Layer w8: v2(811,246) 853,204 974,204 987,217 987,244 v2(1001,258) ; U5.45 980.21,297.79 1018,260 R28.2
  Top Layer w15: SW3.1 399.21,438.79 v2(419,419)
  Bottom Layer w8: v2(419,419) 605.93,232.07 797.07,232.07 v2(811,246)
NetC58_1: C58.1 C61.1 R31.1 U9.4 | length 119.6
  Top Layer w12: U9.4 400,1465.31 C58.1 C61.1@409.68,1545
NetC58_2: C58.2 C59.1 R29.1 U9.5 | length 120.2
  Top Layer w12: C59.1 C58.2 380.32,1464.68 U9.5
NetC59_2: C59.2 U19.3 | length 79.4
  Top Layer w12: U19.3 340,1615 C59.2
NetC60_1: C60.1 U19.4 | length 153.8
  Top Layer w15: C60.1 317.68,1777.99 U19.4
NetC60_2: C60.2 IFOUT.1 | length 56.2
  Top Layer w15: IFOUT.1@128.82,1685 C60.2
NetC61_2: C61.2 U19.1 | length 79.4
  Top Layer w12: C61.2 440,1615 U19.1
NetC63_2: C63.2 R26.1 U11.1 U11.3 | length 288.8
  Top Layer w15: C63.2@58.77,1397.77 U11.1 152.23,1397.77 175,1375 175,1340 155.05,1320.05 U11.3@115,1320.05 ; R26.1 U11.3@115,1320.05 ; U11.3 U11.3@115,1320.05
NetC70_1: C70.1 U9.8 | length 53.7
  Top Layer w10: C70.1 ccw(c345.1,1324.59) 380.32,1324.59 U9.8
NetC70_2: C70.2 T1.2 | length 63.3
  Top Layer w10: T1.2 ccw(c352.93,1210.06) T1.2@370,1210.06
  Top Layer w20: T1.2@370,1210.06 C70.2
NetC71_1: C71.1 T1.6 | length 136.5
  Top Layer w13: C71.1 277.86,1006 ccw(c277.86,1040.14) 302,1016 ccw(c270.62,1047.38) 315,1047.38 T1.6
NetC71_2: C71.2 RFIN.1 | length 60.2
  Top Layer w20: RFIN.1@127.82,1006 C71.2
NetC205_1: C205.1 C207.1 L50.1 R21.1 U10.4 U10.5 | length 403.3
  Top Layer w10: C205.1@240,245.32 259.68,265 R21.1
  Top Layer w12: 235,265 259.68,265 325,265 ; C207.1 325,265 ; U10.5 335.32,265.32 ; U10.4 355,285 335.32,265.32 ; 325,265 325.32,265.32 335.32,265.32 ; 325,265 335,265 335.32,265.32
  Top Layer w15: L50.1@170,160 240,230 C205.1
NetC210_1: C210.1 U10.1 | length 48.9
  Top Layer w8: C210.1 339.68,375.32 U10.1
NetCLKOUT_1: CLKOUT.1 R25.2 | length 76.2
  Top Layer w10: R25.2@1206.57,1053.43 CLKOUT.1
NetL3_1: L3.1 U10.8 U10.9 | length 134.1
  Top Layer w20: L3.1@489.06,105.94 U10.8 489.06,240
NetL3_2: L3.2 U10.6 U10.7 | length 134.1
  Top Layer w20: L3.2@370.94,105.94 U10.7 370.94,240
NetL50_2: L50.2 R55.2 | length 102.4
  Top Layer w15: L50.2@131.89,290 219.53,290 R55.2
NetLED3_2: LED3.2 R6.1 | length 51.3
  Top Layer w10: LED3.2 R6.1
NetR12_1: R12.1 U5.13 U7.4 | length 1289.2
  Top Layer w6: U7.4 944.84,1601.16 967,1623.31 1005.68,1662 v2(1062,1662) ; v2(1032.65,752.65) 1039.27,746.03 U5.13
  Bottom Layer w6: v2(1032.65,752.65) 1031.97,753.33 1031.97,778.61 1032.65,779.3 1032.65,1523.9 1075,1566.25 1075,1649 v2(1062,1662)
NetR14_1: R14.1 U5.12 U7.26 | length 1071.7
  Top Layer w6: U7.26 1054.21,1405.79 1063,1397 1155.31,1397 R14.1 ; U5.12 1087.85,561.57 1105.27,579 1105.27,594.73 1063,637 1063,778.24 1086.76,802 v2(1095,802) ; v2(1162,1341) R14.1@1162,1378.31
  Bottom Layer w6: v2(1095,802) 1071,826 1071,1250 v2(1162,1341)
NetR18_2: R18.2 U7.22 | length 51.1
  Top Layer w10: R18.2@964.53,1305.47 U7.22
NetR19_1: R19.1 X2.1 | length 50.8
  Top Layer w10: R19.1 X2.1@793.81,941.68
NetR20_1: R20.1 R24.2 R25.1 | length 84.8
  Top Layer w10: R24.2 1165,1060 R20.1
NetR21_2: R21.2 R22.1 U10.3 | length 100.1
  Top Layer w8: R21.2 290,330.32 305,315.32 306.14,315.32 306.46,315 310,315 325,300 329.68,304.68 U10.3
NetR23_2: R23.2 R24.1 U8.4 | length 74
  Top Layer w10: U8.4@1096.31,985.31 R24.1 R23.2
NetR27_1: R27.1 SW3.2 | length 61.6
  Top Layer w15: SW3.2@488.72,635 R27.1
NetR37_1: R37.1 U5.44 | length 42.3
  Top Layer w8: R37.1@960.53,275.16 U5.44
NetR38_2: R38.2 U5.7 | length 54.9
  Top Layer w6: U5.7 v2(1103.15,463.15)
  Bottom Layer w6: R38.2@1090,450 v2(1103.15,463.15)
NetU5_14: U5.14 U7.3 | length 1199.4
  Top Layer w6: U7.3 964.53,1574.53 1026,1636 v2(1047,1636) ; v2(1014.49,734.49) 1019.58,729.39 U5.14
  Bottom Layer w6: v2(1014.49,734.49) 1013.81,735.17 1013.81,760.45 1014.49,761.13 1014.49,1523 1055.84,1564.36 1055.84,1627.16 v2(1047,1636)
NetU5_15: U5.15 U7.1 | length 1029.3
  Top Layer w6: v2(996.32,716.32) 999.9,712.75 U5.15 ; U7.1@1003.9,1564.9 v2(1021,1582)
  Bottom Layer w6: v2(996.32,716.32) 995.64,717 995.64,742.29 996.32,742.97 996.32,1545.85 1021,1570.53 v2(1021,1582)
NetU5_16: U5.16 U7.30 | length 1041.8
  Top Layer w6: v2(978.16,698.16) 980.21,696.11 U5.16 ; U7.30 1054.53,1484.53 v2(1075,1505)
  Bottom Layer w6: v2@977.48,698.84 v2(978.16,698.16) 987.32,689 1014,689 1051.49,726.49 1051.49,1481.49 v2(1075,1505)
NetU5_17: U5.17 U7.2 | length 1152.4
  Top Layer w6: v2(960,680) 960.53,679.47 U5.17 ; U7.2 984.21,1571.86 1022.35,1610 v2(1037,1610)
  Bottom Layer w6: v2(960,680) 959.32,680.68 959.32,705.97 960,706.65 960,727 983.84,750.84 983.84,1247.8 983,1248.65 983,1575 1018,1610 v2(1037,1610)
PA9: U5.30
PA10: U5.31
PA11: U5.32 USB2.2 | length 619.9
  Top Layer w6: v2(734,431) 741.22,423.78 U5.32 ; v2(1154,247) 1169.41,231.59 USB2.2
  Bottom Layer w6: v2(734,431) 753.43,431 945.27,239.16 1146.16,239.16 v2(1154,247)
PA12: U5.33 USB2.3 | length 622.1
  Top Layer w6: v2(747.91,404.09) U5.33 ; v2(1183,251) 1195,239 USB2.3
  Bottom Layer w6: v2(747.91,404.09) 763.37,404.09 940.3,227.16 1160.8,227.16 1183,249.35 v2(1183,251)
PA13: P2.3 U5.34 | length 248.5
  Top Layer w6: P2.3 721,369.41 736,384.41 U5.34
PA14: P2.2 U5.37 | length 221.7
  Top Layer w6: P2.2 v2(695.41,255.41) ; v2(750.41,257.59) 785.59,257.59 822.73,294.73 U5.37
  Bottom Layer w6: v2(695.41,255.41) 750.41,255.41 v2(750.41,257.59)
REF: C32.2 R16.2 R20.2 | length 427
  Top Layer w10: C32.2 R16.2 1184.56,1472.44 1208,1449 1208,1178 R20.2
VVCO: C12.1 C15.1 C16.2 C17.1 C18.1 C45.1 C46.1 R10.2 U3.1 U7.6 U7.17 U7.19 | length 1222.5
  Top Layer w10: C45.1 C45.1@866.1,1315.67 ; U7.17 C45.1@866.1,1315.67 ; U7.19 905.47,1337.47 895,1327 877.43,1327 C45.1@866.1,1315.67 ; U7.6 905.47,1580.47 v2(912,1587)
  Top Layer w15: U3.1 R10.2@570.59,1251.77 ; R10.2 616.82,1298 C45.1@850,1298 ; v2(849.18,1307.13) C45.1
  Bottom Layer w10: v2(912,1587) 917.56,1581.44 917.56,1547.13 C18.1@952.56,1547.13
  Bottom Layer w15: v2(849.18,1307.13) 901.31,1255 942,1255 958,1271 958,1333 933,1358 933,1482 932.5,1482.5 932.5,1532.18 917.56,1547.13 912,1552.68 v2(912,1587)
pads on no net: P2.4 SW3.3 SW3.4 T1.5 U1.4 U2.4 U3.3 U3.7 U4.4 U5.2 U5.3 U5.4 U5.10 U5.11 U5.18 U5.19 U5.20 U5.21 U5.25 U5.26 U5.27 U5.29 U5.38 U5.39 U5.40 U5.41 U5.42 U5.43 U5.46 U6.4 U7.28 U8.1 U10.14 U11.4 USB2.4

## Polygon pours and split planes (outlines as drawn)
3.3RF on Bottom Layer "3.3RF_L04_P000" (solid, remove dead copper, pour order 0): 600,1640 820,1640 820,1040 600,1040
GND on Top Layer "GND_L01_P002" (solid, remove dead copper, pour order 2): 315,1345 373,1403 416.53,1403 450,1369.53 450,1340 440,1340 430,1330 358,1330
GND on Internal Plane 1 (split plane): 1384.31,1853.77 1387,1852.96 1389.48,1851.63 1391.65,1849.85 1393.43,1847.68 1394.75,1845.21 1395.57,1842.52 1395.81,1840.06 1395.78,1839.72 1395.78,31.96 1395.81,31.63 1395.57,29.17 1394.75,26.48 1393.43,24 1391.65,21.83 1389.48,20.05 1387,18.73 1384.31,17.91 1381.85,17.67 1381.52,17.7 33.76,17.7 33.42,17.67 30.96,17.91 28.27,18.73 25.8,20.05 23.63,21.83 21.85,24 20.52,26.48 19.71,29.17 19.46,31.63 19.5,31.96 19.5,1839.72 19.46,1840.06 19.71,1842.52 20.52,1845.21 21.85,1847.68 23.63,1849.85 25.8,1851.63 28.27,1852.96 30.96,1853.77 33.42,1854.02 33.76,1853.98 1381.52,1853.98 1381.85,1854.02
3.3A on Internal Plane 2 (split plane): 1384.31,1853.77 1387,1852.96 1389.48,1851.63 1391.65,1849.85 1393.43,1847.68 1394.75,1845.21 1395.57,1842.52 1395.81,1840.06 1395.78,1839.72 1395.78,1294.09 766.09,1294.09 766.09,1853.98 1381.52,1853.98 1381.85,1854.02
3.3D on Internal Plane 2 (split plane): 1395.78,31.96 1395.81,31.63 1395.57,29.17 1394.75,26.48 1393.43,24 1391.65,21.83 1389.48,20.05 1387,18.73 1384.31,17.91 1381.85,17.67 1381.52,17.7 605.09,17.7 605.09,684.91 1395.78,684.91
GND on Internal Plane 2 (split plane): 33.76,1853.98 745.91,1853.98 745.91,1284 746.26,1281.39 747.27,1278.96 748.87,1276.87 750.96,1275.27 753.39,1274.26 756,1273.91 1395.78,1273.91 1395.78,705.09 595,705.09 592.39,704.74 589.96,703.74 587.87,702.13 586.27,700.04 585.26,697.61 584.91,695 584.91,17.7 33.76,17.7 33.42,17.67 30.96,17.91 28.27,18.73 25.8,20.05 23.63,21.83 21.85,24 20.52,26.48 19.71,29.17 19.46,31.63 19.5,31.96 19.5,1839.72 19.46,1840.06 19.71,1842.52 20.52,1845.21 21.85,1847.68 23.63,1849.85 25.8,1851.63 28.27,1852.96 30.96,1853.77 33.42,1854.02

## Keep-outs
Keep-Out Layer:
  lines w10: 1420.89,1839.72 ccw(c1381.52,1839.72) 1381.52,1879.09 33.76,1879.09 ccw(c33.76,1839.72) -5.61,1839.72 -5.61,31.96 ccw(c33.76,31.96) 33.76,-7.41 1381.52,-7.41 ccw(c1381.52,31.96) 1420.89,31.96 1420.89,1842.98

## Other copper
Internal Plane 2 (plane layer: these items are gaps in the copper):
  lines w20: 595,-2.39 595,695 1415,695 ; 755,1874.08 756,1874.08 756,1284 1415.87,1284